# Altium PCB PCB1.PcbDoc
Units mil, origin at the board's own origin, x right, y up, seen from the top; angles counter-clockwise.
Board outline 820 x 2400 mil, 2 copper layers (Top Layer, Bottom Layer); 13 components, 14 nets, 54 pads, 10 vias.
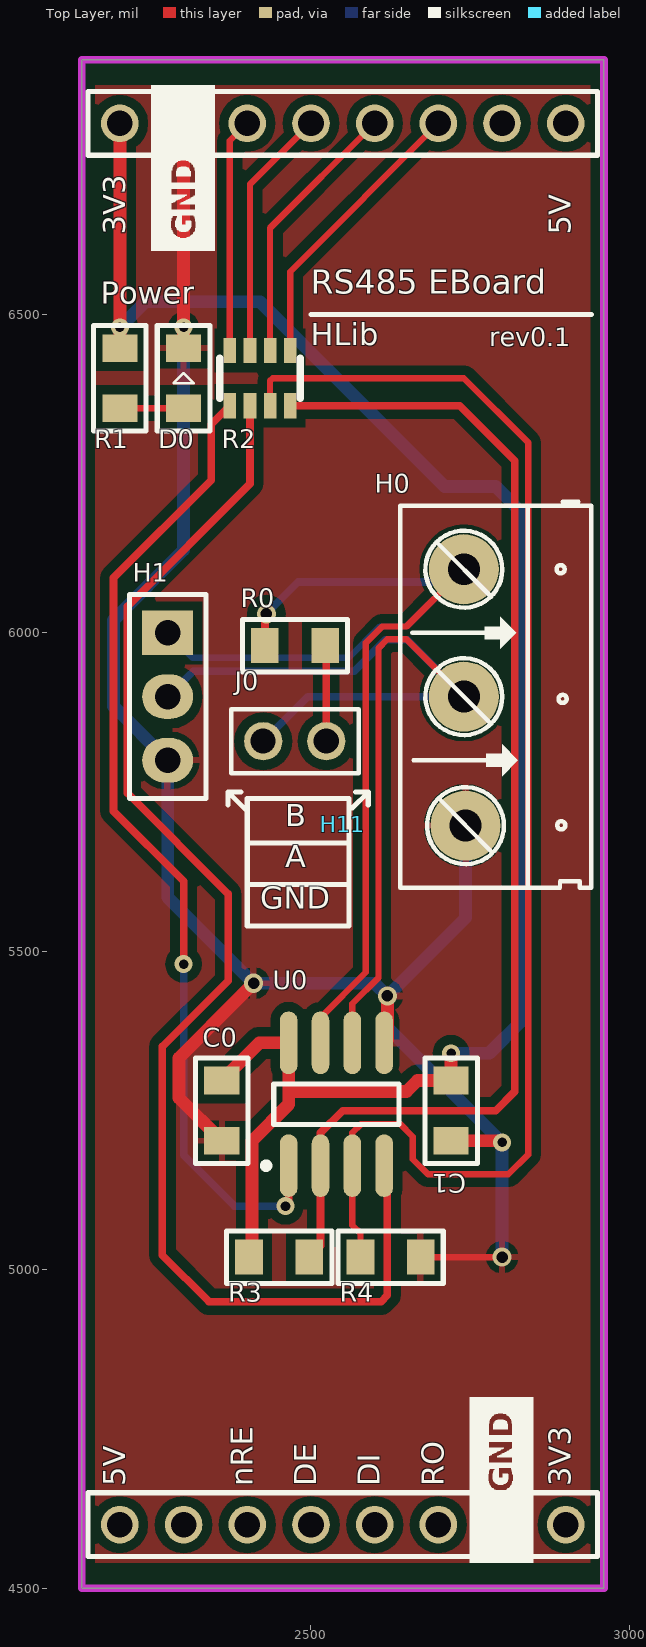
[diagram p0: Top Layer view]
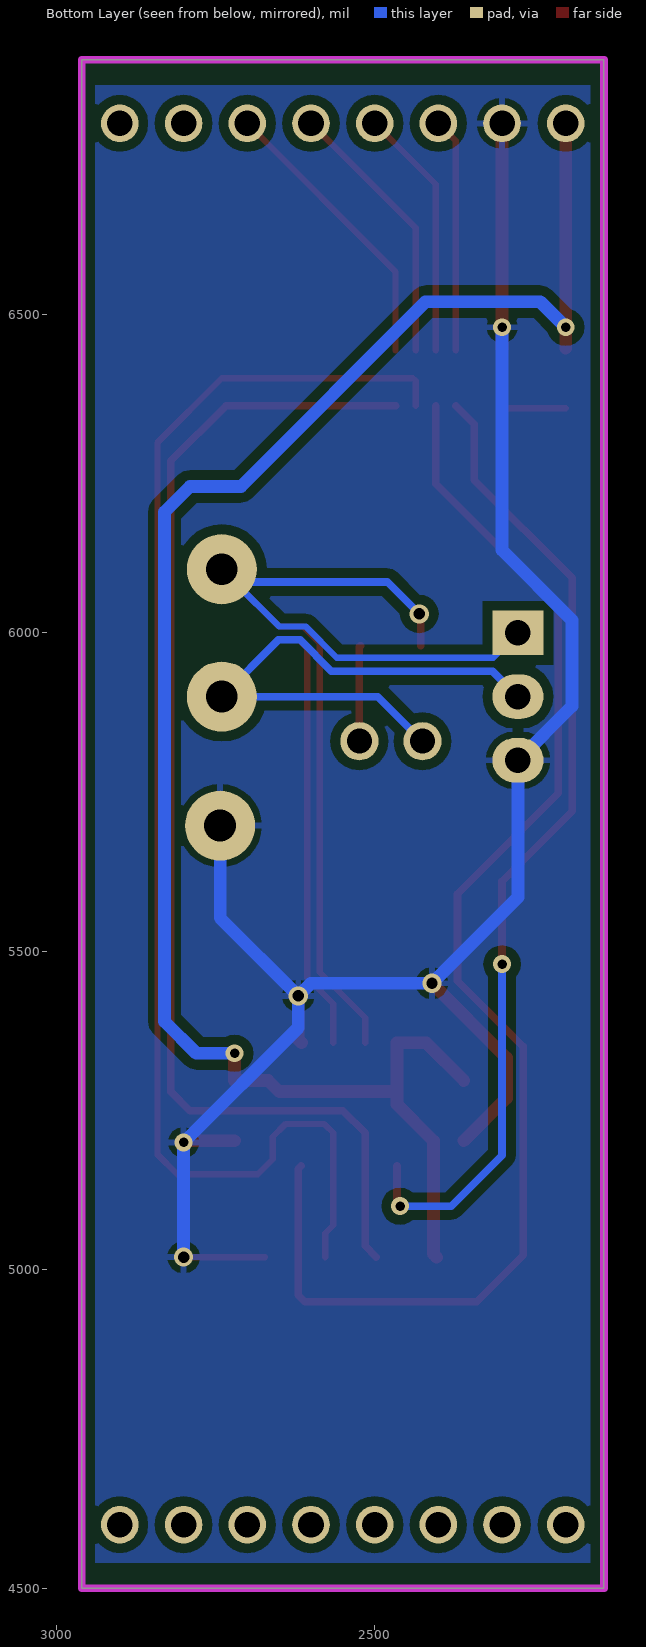
[diagram p1: Bottom Layer view, seen from below]
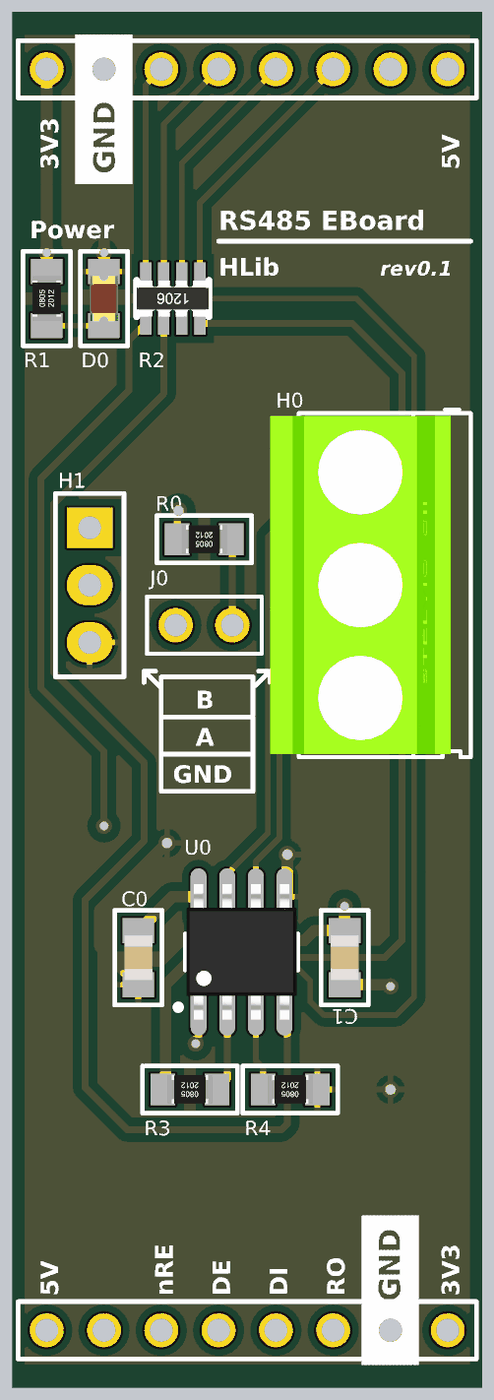
[diagram p2: 3D render of the assembled board from above, using the file's embedded part models]

## Layer stack, top to bottom
Top Solder: solder mask 0.4, Solder Resist, Dk 3.5
Top Layer: signal copper 1.4
Dielectric1: dielectric 12.6, FR-4, Dk 4.8
Bottom Layer: signal copper 1.4
Bottom Solder: solder mask 0.4, Solder Resist, Dk 3.5

## Board outline
2140,4500 2140,6900 2960,6900 2960,4500

## Design rules (kind name [scope] priority, off if disabled: settings)
Clearance [InPolygon] p1: gap=15
Clearance Clearance_1 [All] p2: gap=10
DiffPairsRouting [All] p1: maxlimit=10 minlimit=10 mostfreqgap=10 toplayer_minwidth=15 toplayer_maxwidth=15 toplayer_prefwidth=15 bottomlayer_minwidth=15 bottomlayer_maxwidth=15 bottomlayer_prefwidth=15 maxuncoupledlength=500
PolygonConnect [All] p1: connectstyle=Relief reliefconductorwidth=10 reliefentries=4 polygonreliefangle="90 Angle" airgapwidth=10
RoutingVias [All] p1: holewidth=25 width=40 viastyle="Through Hole" minholewidth=28 minwidth=50 maxholewidth=28 maxwidth=50
SolderMaskExpansion [All] p1: expansion=4
Width [All] p1: maxlimit=25 minlimit=8 preferedwidth=10
29 further rules are at their usual default settings.

## Classes and differential pairs
differential pair D: +D_P -D_N

## Components (designator, comment, footprint, x,y, rotation, side; value= is the part's Value field where it differs from the comment)
C0 "C_Ceramic" SM_0805_C_CERAMIC 2360,5250 r90 top
C1 "C_Ceramic" SM_0805_C_CERAMIC 2720,5250 r90 top
D0 "LED" SM_0805_LED 2300,6400 r90 top
H0 "Header 3" TerminalBlock_3_5mm 2740,6100 r270 top
H1 "Header 3" Hed3 2275,6000 r270 top
H11 "MBoard1_BH_DualPorts" MBoard1_BH_DualPorts 2200,6800 r0 top
J0 "Jumper 2" J2 2425,5830 r0 top
R0 "R" SM_0805_R 2475,5980 r180 top
R1 "R" SM_0805_R 2200,6400 r90 top
R2 "220" RA4 2420,6400 r180 top
R3 "R" SM_0805_R 2450,5020 r180 top
R4 "R" SM_0805_R 2625,5020 r180 top
U0 "MAX3485" SO-8 2540,5260 r90 top

## Footprints (in the part's own frame and the unit in brackets; to place one, negate y for a bottom-side part, rotate by r counter-clockwise, add the part's x,y. Pads: shape width x height; smd on the part's side, far side on the other; paste and mask are expansions set on the pad)
Hed3 [mil]
  rect 70x80 hole 40: 1(0,0)
  oval 70x80 hole 40: 2(100,0) 3(200,0)
  silkscreen extent -60,-60 260,60
J2 [mil] "Jum select vdd or gnd"
  round 60 hole 39.37: 1(0,0) 2(99,0)
  silkscreen extent -50,-50 150,50
MBoard1_BH_DualPorts [mm]
  round 1.5 hole 1.02: 1(0,0) 2(2.54,0) 3(5.08,0) 4(7.62,0) 5(10.16,0) 6(12.7,0) 7(15.24,0) 8(17.78,0) 9(17.78,-55.88) 10(15.24,-55.88) 11(12.7,-55.88) 12(10.16,-55.88) 13(7.62,-55.88) 14(5.08,-55.88) 15(2.54,-55.88) 16(0,-55.88)
  silkscreen extent -1.27,-57.15 19.05,1.27, body extent -1.27,-57.15 19.05,1.27, height 8
RA4 [mm] "Resistor Array (0603x4) form TME"
  rect 0.5x1 smd: 1(-1.2,-1.1) 2(-1.2,1.1) 3(-0.4,-1.1) 4(-0.4,1.1) 5(0.4,-1.1) 6(0.4,1.1) 7(1.2,-1.1) 8(1.2,1.1)
  silkscreen extent -1.6,-0.8 1.6,0.8, body extent -1.6,-0.8 1.6,0.8, height 0.5
SM_0805_C_CERAMIC [mm] "General Surface-mount cap, low density"
  rect 1.1x1.4 smd: 1(-1.2,0) 2(1.2,0)
  silkscreen extent -2.1,-1.05 2.1,1.05, body extent -1,-0.62 1,0.63, height 0.58
SM_0805_LED [mm] "General polarized surface-mount Led, low density"
  rect 1.1x1.4 smd: 1(-1.2,0) 2(1.2,0)
  silkscreen extent -2.1,-1.05 2.1,1.05, body extent -1.01,-0.62 1.01,0.63, height 1.1
SM_0805_R [mm] "General Surface-mount resistor, low density"
  rect 1.1x1.4 smd: 1(-1.2,0) 2(1.2,0)
  silkscreen extent -2.1,-1.05 2.1,1.05, body extent -1,-0.63 1,0.62, height 0.45
SO-8 [mm]
  oval 2.5x0.7 smd: 1(-2.45,1.905) 2(-2.45,0.635) 3(-2.45,-0.635) 4(-2.45,-1.905) 5(2.45,-1.905) 6(2.45,-0.635) 7(2.45,0.635) 8(2.45,1.905)
  silkscreen extent -2.57,-2.5 0.8,2.93, body extent -3,-2.45 3,2.45, height 1.75
TerminalBlock_3_5mm [mil]
  round 110 hole 50: 1(0,0) 2(200,0) 3(402.62,2.62)
  silkscreen extent -106,-100 500,200, body extent -95,-150 495,165, height 394

## Part data
C0 C1: "Non-polarity ceramic capacitor"
H0 H1: library part Hed3, "Header 3 (Green)"
J0: library part "JP 2"
R0 R1 R3 R4: "Resistor"
R2: library part RA4
U0: library part MAX485, "RS232 - RS485 (Same sn75176)"

## Via types
v1: diameter 28, hole 15, Top Layer to Bottom Layer, tented both sides, 6 vias
v2: diameter 30, hole 18, Top Layer to Bottom Layer, tented both sides, 4 vias

## Nets (pads, with @x,y where several pads share a name; then routed paths per layer and width w, separated by ;. In a path a pad name is that pad's centre, name@x,y a point inside that pad or via, vN(x,y) a via of type N, cw(c..) or ccw(c..) an arc to the next point about the centre after c; other vN are vias at no path point)
3V3: C0.2 C1.2 H11.1 R1.2 R3.2 U0.8 | length 2863.4
  Top Layer w20: R1.2 v1(2200,6480) H11.1 ; C0.2 2419.21,5356.46 U0.8 2465,5280 ; R3.2 2407.56,5024.8 2407.56,5202.56 2465,5260 2465,5280 ; v1(2720,5340) C1.2 2667.24,5297.24 2650,5280 2465,5280
  Bottom Layer w20: v1(2200,6480) 2240,6520 2420,6520 2710,6230 2790,6230 2830,6190 2830,5390 2780,5340 v1(2720,5340)
D_N: H0.1 H1.1 R0.2 U0.7 | length 1756.4
  Top Layer w10: U0.7 2515,5396 2586,5467 2586,5984.28 2611.72,6010 2650,6010 H0.1
  Top Layer w12: R0.2 v2@2427.76,6027.76
  Bottom Layer w10: H1.1 2314,5961 2559.3,5961 2608.3,6010 2650,6010 2720,6080 H0.1
  Bottom Layer w12: v2(2430,6030) 2480,6080 H0.1@2720,6080
D_P: H0.2 H1.2 J0.1 U0.6 | length 1696.3
  Top Layer w10: U0.6 2565,5417.72 2606,5458.72 2606,5976 2620,5990 2650,5990 H0.2
  Bottom Layer w12: H1.2 2315,5940 2568,5940 2617,5989 2651,5989 H0.2 2495,5900 J0.1
GND: C0.1 C1.1 D0.2 H0.3 H1.3 H11.2 R4.1 U0.5 | length 3144.7
  Top Layer w10: R4.1 v2(2800,5020)
  Top Layer w20: D0.2 v1(2300,6480) H11.2 ; C0.1 2292.76,5270 2292.76,5332.76 v2(2410,5450) ; U0.5 2620,5361.46 v2(2620,5430) ; C1.1 v1@2797.24,5202.76
  Bottom Layer w20: v1(2300,6480) 2300,6130 2190,6020 2190,5885 H1.3 2275,5585 v2(2410,5450) 2600,5450 v2(2620,5430) ; H0.3 2742.62,5552.62 v2(2620,5430) ; v2(2800,5020) v1(2800,5200) 2620,5380 v2(2620,5430)
NetD0_1: D0.1 R1.1 | length 100
  Top Layer w10: R1.1 D0.1
NetH11_3: H11.3 R2.7 | length 368
  Top Layer w10: R2.7 2372.76,6772.76 H11.3
NetH11_4: H11.4 R2.5 | length 396.4
  Top Layer w10: R2.5 2404.25,6704.25 H11.4
NetH11_5: H11.5 R2.3 | length 424.7
  Top Layer w10: R2.3 2435.75,6635.75 H11.5
NetH11_6: H11.6 R2.1 | length 453.1
  Top Layer w10: R2.1 2467.24,6567.24 H11.6
NetJ0_2: J0.2 R0.1 | length 150.7
  Top Layer w12: R0.1 2524,5978.24 J0.2
U_IO1: R2.4 R4.2 U0.3 | length 2154.2
  Top Layer w10: R2.4 2435.75,6395.75 2440,6400 2740,6400 2841,6299 2841,5181 2810,5150 2683.78,5150 2660,5173.78 2660,5209 2640,5229 2579,5229 2565,5215 U0.3 2565,5070 2577.76,5057.24 R4.2
U_IO2: R2.2 R3.1 U0.2 | length 1912.9
  Top Layer w12: R2.2 2733.31,6356.69 2820,6270 2820,5280 2790,5250 2550,5250 2515,5215 U0.2 2515,5037.76 R3.1
U_RX: R2.8 U0.1 | length 1556.7
  Top Layer w12: v1(2300,5480) 2300,5610 2190,5720 2190,6086.44 2343.56,6240 2343.56,6327.5 R2.8 ; v1(2460,5100) 2465,5105 U0.1
  Bottom Layer w12: v1(2300,5480) 2300,5180 2380,5100 v1(2460,5100)
U_TX: R2.6 U0.4 | length 2114.6
  Top Layer w12: R2.6 2404.25,6234.25 2212,6042 2212,5748 2370,5590 2370,5453.84 2266.76,5350.6 2266.76,5023.24 2340,4950 2610,4950 2620,4960 2620,5158.54 U0.4
pads on no net: H11.7 H11.8 H11.9 H11.10 H11.11 H11.12 H11.13 H11.14 H11.15 H11.16

## Polygon pours and split planes (outlines as drawn)
GND on Top Layer "Top" (solid, remove dead copper, pour order 4): 2140,6860 2960,6860 2960,4540 2140,4540
GND on Bottom Layer "Bot" (solid, remove dead copper, pour order 4): 2140,6860 2960,6860 2960,4540 2140,4540

## Keep-outs
Keep-Out Layer:
  the board outline again, w12

## Silkscreen, mask and mechanical layers (free items; w line width, h text height)
Top Overlay:
  drawing of 620 lines, arcs and shapes, not listed
  text "3V3" at 2220,6625 h60 r90
  text "5V" at 2920,6625 h60 r90
  text "RS485 EBoard" at 2500,6520 h65
  text "Power" at 2170,6505 h60
  text "HLib" at 2500,6440 h60
  text "rev0.1" at 2780,6440 h50
  text "B" at 2460,5685 h60
  text "A" at 2460,5620 h60
  text "GND" at 2420,5555 h60
  text "5V" at 2220,4660 h60 r90
  text "nRE" at 2420,4660 h60 r90
  text "DE" at 2520,4660 h60 r90
  text "DI" at 2620,4660 h60 r90
  text "RO" at 2720,4660 h60 r90
  text "3V3" at 2920,4660 h60 r90
Drill Drawing:
  text ".LEGEND" at 7200,3200 h60
  text "Drill Drawing." at 7200,3100 h60

## Dimensions
2140,4500 to 2960,4500 on Mechanical 1
2140,4500 to 2140,6900 on Mechanical 1